# Altium PCB PCB_CSN_V3_1.PcbDoc
Units mil, origin at the board's own origin, x right, y up, seen from the top; angles counter-clockwise.
Board outline 3040 x 2075 mil, 2 copper layers (Top Layer, Bottom Layer); 83 components, 64 nets, 348 pads, 55 vias.
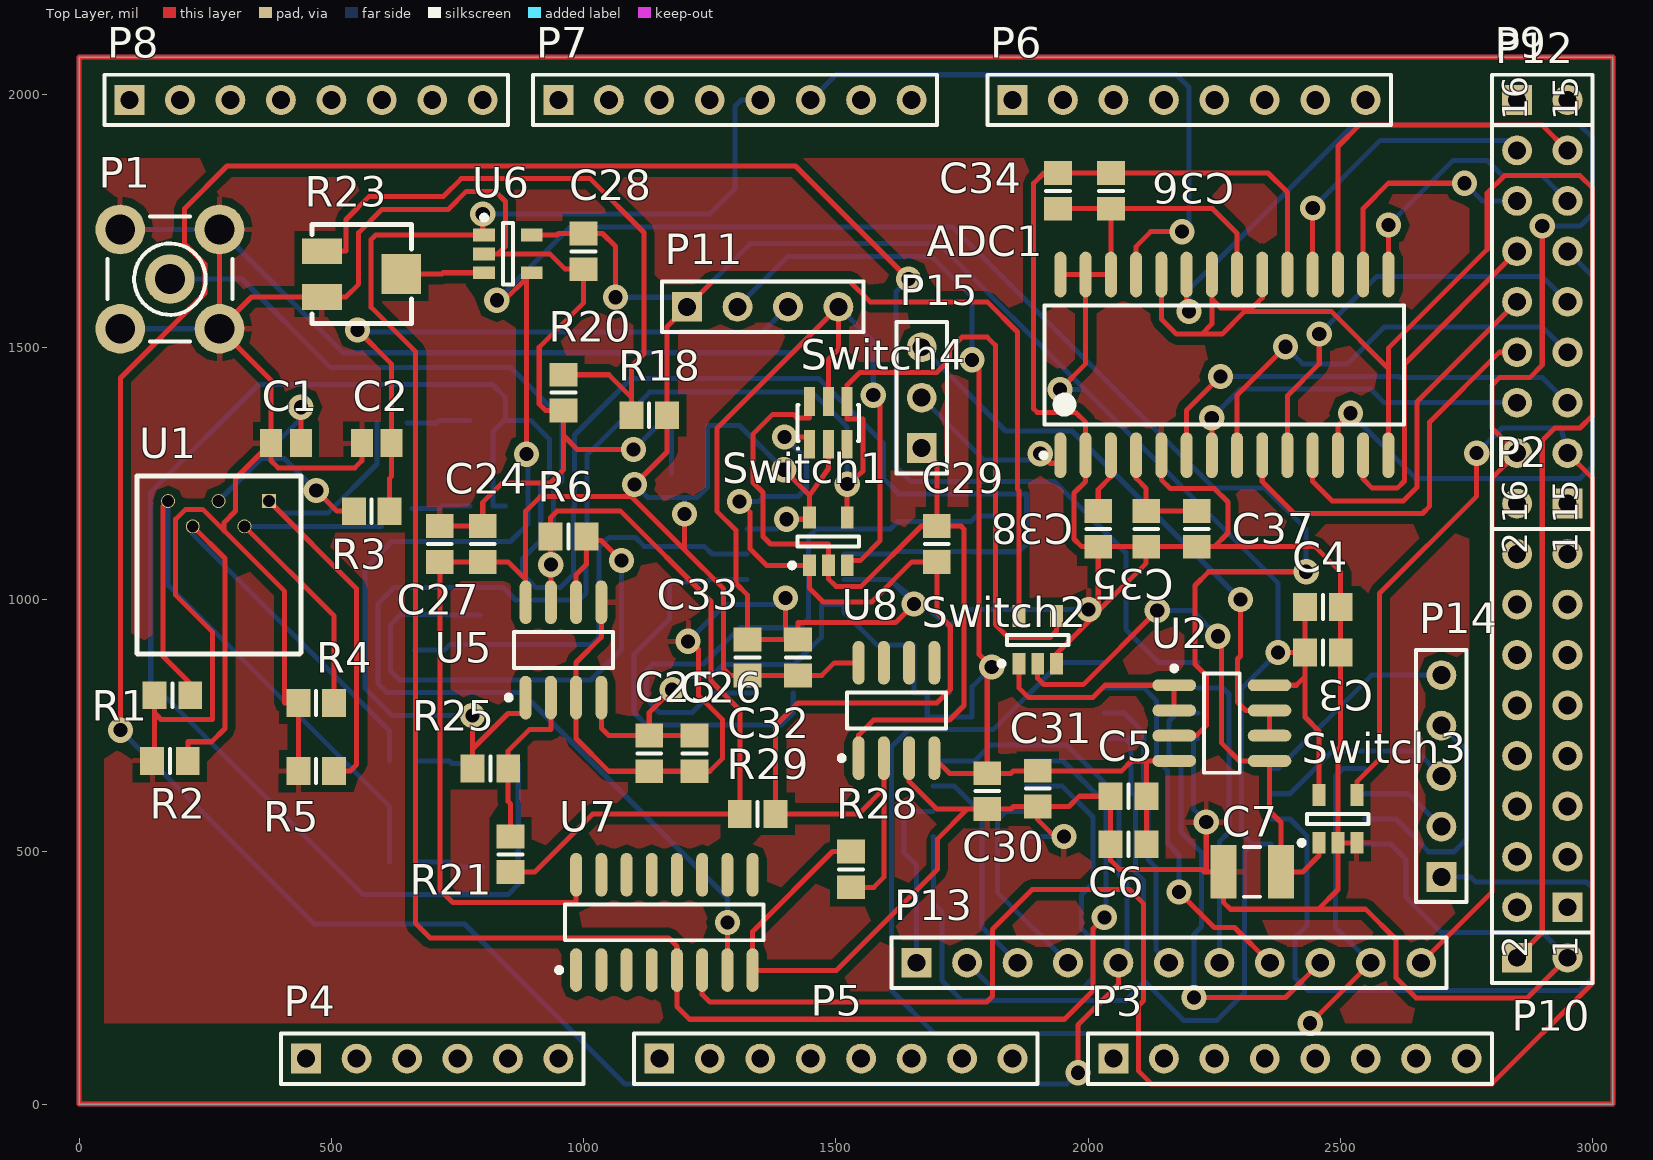
[diagram p0: Top Layer view]
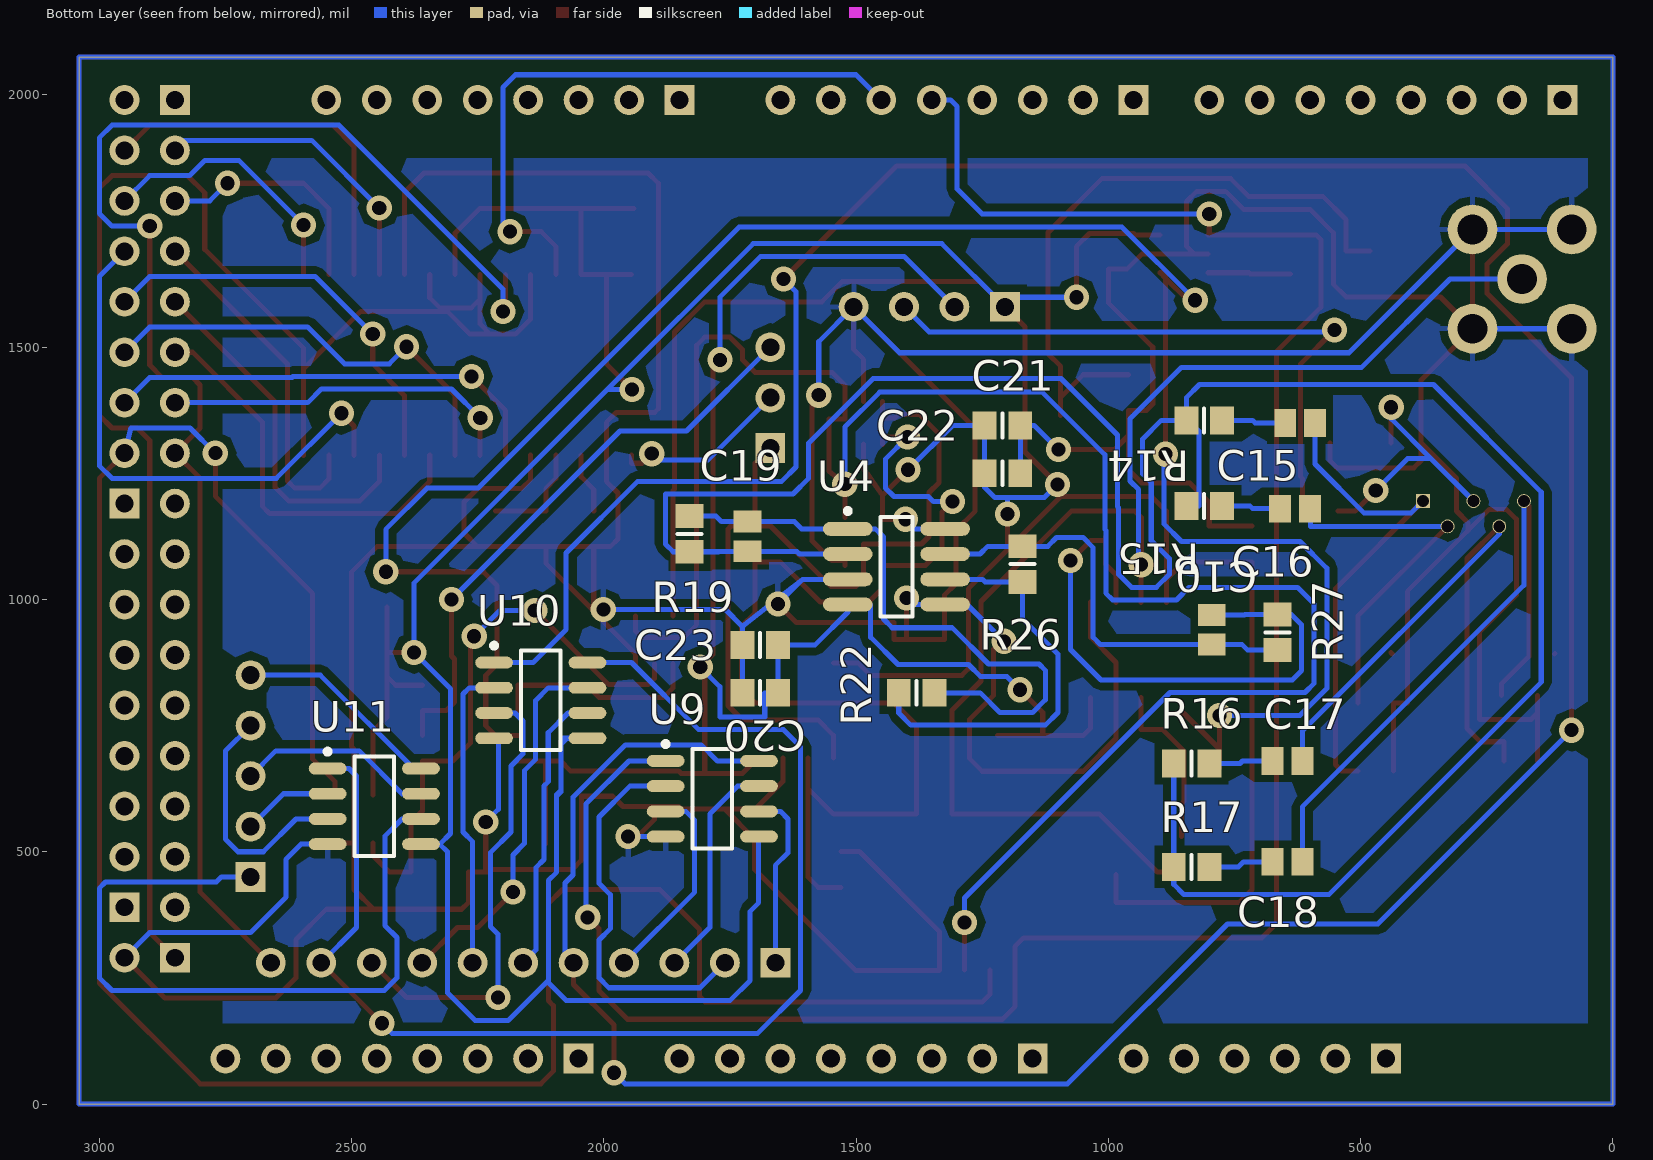
[diagram p1: Bottom Layer view, seen from below]

## Layer stack, top to bottom
Top Layer: signal copper 1.4
Dielectric: dielectric 12.6, FR-4, Dk 4.8
Bottom Layer: signal copper 1.4

## Board outline
0,0 0,2075 3040,2075 3040,0 0,0

## Design rules (kind name [scope] priority, off if disabled: settings)
Clearance [All] p1: gap=15
PolygonConnect [All] p1: connectstyle=Relief reliefconductorwidth=10 reliefentries=4 polygonreliefangle="90 Angle"
RoutingVias [All] p1: holewidth=28 width=50 viastyle="Through Hole" minholewidth=28 minwidth=50 maxholewidth=28 maxwidth=50
SilkscreenOverComponentPads [All] p1: minsilkscreentomaskgap=10
SolderMaskExpansion [All] p1: expansion=4
Width [All] p1: maxlimit=10 minlimit=10 preferedwidth=10
27 further rules are at their usual default settings.

## Classes and differential pairs
net class potencia: +5 +70V -5 GND
component class Logica_ADC: ADC1 C3 C4 C5 C6 C7 C29 C30 C31 C32 C33 C34 C35 C36 C37 C38 P2 P3 P4 P5 P6 P7 P8 P9 P10 P11 P12 P13 P14 P15 R28 Switch1 Switch2 Switch3 Switch4 U2 U7 U8 U9 U10 U11
component class Hamamatsu_acond_2: C1 C2 C10 C15 C16 C17 C18 C19 C20 C21 C22 C23 C24 C25 C26 C27 C28 P1 R1 R2 R3 R4 R5 R6 R14 R15 R16 R17 R18 R19 R20 R21 R22 R23 R25 R26 R27 R29 U1 U4 U5 U6
net class analog: NetADC1_4 NetC29_1 NetC29_2 NetR18_2 NetR23_W NetR25_2
net class digital: DGND NetADC1_18 NetADC1_23 NetADC1_25

## Components (designator, comment, footprint, x,y, rotation, side; value= is the part's Value field where it differs from the comment)
ADC1 "LTC1415" SO28_N 2270,1465 r90 top
C1 "Cap" C0805 410,1310 r0 top
C2 "Cap" C0805 590,1310 r0 top
C3 "Cap" 6-0805_N 2465,895 r180 top
C4 "Cap Pol3" 6-0805_N 2465,985 r0 top
C5 "Cap" 6-0805_N 2080,610 r180 top
C6 "Cap Pol3" 6-0805_N 2080,515 r0 top
C7 "Cap" C1210_N 2325,460 r0 top
C10 "Cap" C0805 795,940 r90 bottom
C15 "Cap" C0805 620,1350 r0 bottom
C16 "Cap" C0805 630,1180 r0 bottom
C17 "Cap" C0805 645,680 r0 bottom
C18 "Cap" C0805 645,480 r0 bottom
C19 "Cap" C0805 1715,1125 r90 bottom
C20 "Cap Pol3" 6-0805_N 1690,815 r180 bottom
C21 "Cap Pol3" 6-0805_N 1210,1345 r180 bottom
C22 "Cap" 6-0805_N 1210,1250 r0 bottom
C23 "Cap" 6-0805_N 1690,910 r180 bottom
C24 "Cap" 6-0805_N 800,1110 r270 top
C25 "Cap" 6-0805_N 1130,695 r270 top
C26 "Cap Pol3" 6-0805_N 1220,695 r90 top
C27 "Cap Pol3" 6-0805_N 715,1110 r90 top
C28 "Cap" 6-0805_N 1000,1690 r270 top
C29 "Cap" 6-0805_N 1700,1110 r90 top
C30 "Cap" 6-0805_N 1800,620 r270 top
C31 "Cap Pol3" 6-0805_N 1900,625 r90 top
C32 "Cap" 6-0805_N 1425,885 r270 top
C33 "Cap Pol3" 6-0805_N 1325,885 r90 top
C34 "Cap Pol3" 6-0805_N 1940,1810 r90 top
C35 "Cap Pol3" 6-0805_N 2115,1140 r270 top
C36 "Cap" 6-0805_N 2045,1810 r270 top
C37 "Cap" 6-0805_N 2215,1140 r90 top
C38 "Cap" 6-0805_N 2020,1140 r270 top
P1 "SMB" SMB_V-RJ45 180,1635 r0 top
P2 "Header 8X2" HDR2X8 2950,390 r90 top
P3 "Header 8" HDR1X8 2050,90 r0 top
P4 "Header 6" HDR1X6 450,90 r0 top
P5 "Header 8" HDR1X8 1150,90 r0 top
P6 "Header 8" HDR1X8 1850,1990 r0 top
P7 "Header 8" HDR1X8 950,1990 r0 top
P8 "Header 8" HDR1X8 100,1990 r0 top
P9 "Header 2" HDR1X2 2850,1990 r0 top
P10 "Header 2" HDR1X2 2850,290 r0 top
P11 "Header 4" HDR1X4 1205,1580 r0 top
P12 "Header 8X2" HDR2X8 2950,1190 r90 top
P13 "Header 11" HDR1X11 1660,280 r0 top
P14 "Header 5" HDR1X5 2700,450 r90 top
P15 "Header 3" HDR1X3 1670,1300 r90 top
R1 "Res3" 6-0805_N 185,810 r0 top
R2 "Res3" 6-0805_N 180,680 r0 top
R3 "Res3" 6-0805_N 580,1175 r0 top
R4 "Res3" 6-0805_N 470,795 r0 top
R5 "Res3" 6-0805_N 470,660 r0 top
R6 "Res3" 6-0805_N 970,1125 r180 top
R14 "Res3" 6-0805_N 810,1355 r0 bottom
R15 "Res3" 6-0805_N 810,1185 r0 bottom
R16 "Res3" 6-0805_N 835,675 r0 bottom
R17 "Res3" 6-0805_N 835,470 r0 bottom
R18 "Res3" 6-0805_N 1130,1365 r180 top
R19 "Res3" 6-0805_N 1830,1130 r90 bottom
R20 "Res3" 6-0805_N 960,1410 r90 top
R21 "Res3" 6-0805_N 855,495 r90 top
R22 "Res3" 6-0805_N 1380,815 r180 bottom
R23 "RPot SM" POT4MM-2 560,1645 r0 top
R25 "Res3" 6-0805_N 815,665 r180 top
R26 "Res3" 6-0805_N 1170,1070 r90 bottom
R27 "Res3" 6-0805_N 665,935 r90 bottom
R28 "Res3" 6-0805_N 1530,465 r90 top
R29 "Res3" 6-0805_N 1345,575 r0 top
Switch1 "SN74LVC1G66DBVR" SOT23-5_N 1485,1115 r90 top
Switch2 "SN74LVC1G66DBVR" SOT23-5_N 1900,920 r90 top
Switch3 "SN74LVC1G66DBVR" SOT23-5_N 2495,565 r90 top
Switch4 "ADG751" SOT-23_A 1485,1350 r0 top
U1 "MPPC_S10985" S10985_HAM 115,1245 r0 top
U2 "AD8066" S8_N 2265,755 r0 top
U4 "AD8056" SO-8_M 1420,1065 r180 bottom
U5 "AD8056" S8_N 960,900 r90 top
U6 "ADCMP600" SOT23-5_N 850,1685 r0 top
U7 "SN74LS279AD" D016_N 1160,360 r90 top
U8 "AD8066" S8_N 1620,780 r90 top
U9 "DS1100-500" SO-8_L 1785,605 r180 bottom
U10 "DS1100-500" SO-8_L 2125,800 r180 bottom
U11 "DS1100-500" SO-8_L 2455,590 r180 bottom

## Footprints (in the part's own frame and the unit in brackets; to place one, negate y for a bottom-side part, rotate by r counter-clockwise, add the part's x,y. Pads: shape width x height; smd on the part's side, far side on the other; paste and mask are expansions set on the pad)
6-0805_N [mm] "Chip Resistor, Body 2.0x1.2mm, IPC Medium Density"
  rect 1.2x1.4 smd: 1(-0.9,0) 2(0.9,0)
  silkscreen extent 0,-0.6 0,0.6, body extent -1.07,-0.7 1.07,0.7, height 0.7
C0805 [mm] "Chip Capacitor, Body 2.0x1.3mm, IPC High Density"
  rect 1.1x1.4 smd: 1(-0.75,0) 2(0.75,0)
  body extent -1.1,-0.72 1.1,0.72, height 1.4
C1210_N [mm] "Chip Capacitor, Body 3.2x2.5mm, IPC Medium Density"
  rect 1.3x2.7 smd: 1(-1.45,0) 2(1.45,0)
  silkscreen extent -0.4,-1.25 0.4,1.25, body extent -1.7,-1.35 1.7,1.35, height 1.5
D016_N [mm] "SOIC, 16-Leads, Body 9.9x3.9mm, Pitch 1.27mm, IPC Medium Density"
  oval 2.2x0.6 smd: 1(-2.4,4.445) 2(-2.4,3.175) 3(-2.4,1.905) 4(-2.4,0.635) 5(-2.4,-0.635) 6(-2.4,-1.905) 7(-2.4,-3.175) 8(-2.4,-4.445) 9(2.4,-4.445) 10(2.4,-3.175) 11(2.4,-1.905) 12(2.4,-0.635) 13(2.4,0.635) 14(2.4,1.905) 15(2.4,3.175) 16(2.4,4.445)
  silkscreen extent -2.52,-5 0.9,5.42, body extent -1.95,-4.95 1.95,4.95, height 1.75
HDR1X2 [mm] "Connector; Header; 2 Position"
  rect 1.5x1.5 hole 0.9: 1(0,0)
  round 1.5 hole 0.9: 2(2.54,0)
  silkscreen extent -1.27,-1.27 3.81,1.27
HDR1X3 [mm] "Connector; Header; 3 Position"
  rect 1.5x1.5 hole 0.9: 1(0,0)
  round 1.5 hole 0.9: 2(2.54,0) 3(5.08,0)
  silkscreen extent -1.27,-1.27 6.35,1.27
HDR1X4 [mm] "Connector; Header; 4 Position"
  rect 1.5x1.5 hole 0.9: 1(0,0)
  round 1.5 hole 0.9: 2(2.54,0) 3(5.08,0) 4(7.62,0)
  silkscreen extent -1.27,-1.27 8.89,1.27
HDR1X5 [mm] "Connector; Header; 5 Position"
  rect 1.5x1.5 hole 0.9: 1(0,0)
  round 1.5 hole 0.9: 2(2.54,0) 3(5.08,0) 4(7.62,0) 5(10.16,0)
  silkscreen extent -1.27,-1.27 11.43,1.27
HDR1X6 [mm] "Connector; Header; 6 Position"
  rect 1.5x1.5 hole 0.9: 1(0,0)
  round 1.5 hole 0.9: 2(2.54,0) 3(5.08,0) 4(7.62,0) 5(10.16,0) 6(12.7,0)
  silkscreen extent -1.27,-1.27 13.97,1.27
HDR1X8 [mm] "Connector; Header; 8 Position"
  rect 1.5x1.5 hole 0.9: 1(0,0)
  round 1.5 hole 0.9: 2(2.54,0) 3(5.08,0) 4(7.62,0) 5(10.16,0) 6(12.7,0) 7(15.24,0) 8(17.78,0)
  silkscreen extent -1.27,-1.27 19.05,1.27
HDR1X11 [mm] "Connector; Header; 11 Position"
  rect 1.5x1.5 hole 0.9: 1(0,0)
  round 1.5 hole 0.9: 2(2.54,0) 3(5.08,0) 4(7.62,0) 5(10.16,0) 6(12.7,0) 7(15.24,0) 8(17.78,0) 9(20.32,0) 10(22.86,0) 11(25.4,0)
  silkscreen extent -1.27,-1.27 26.67,1.27
HDR2X8 [mm] "Connector; Header; 8x2 Position"
  rect 1.5x1.5 hole 0.9: 1(0,0)
  round 1.5 hole 0.9: 2(0,2.54) 3(2.54,0) 4(2.54,2.54) 5(5.08,0) 6(5.08,2.54) 7(7.62,0) 8(7.62,2.54) 9(10.16,0) 10(10.16,2.54) 11(12.7,0) 12(12.7,2.54) 13(15.24,0) 14(15.24,2.54) 15(17.78,0) 16(17.78,2.54)
  silkscreen extent -1.27,-1.27 19.05,3.81
POT4MM-2 [mm] "Square Trimming Potentiometer"
  rect 2x1.3 smd: CCW(-2,-1.15) CW(-2,1.15)
  rect 2x2 smd: W(2,0)
  silkscreen extent -2.5,-2.5 2.5,2.5
S8_N [mm] "SOIC, 8-Leads, Body 4.9x3.9mm, Pitch 1.27mm, IPC Medium Density"
  oval 2.2x0.6 smd: 1(-2.4,1.905) 2(-2.4,0.635) 3(-2.4,-0.635) 4(-2.4,-1.905) 5(2.4,-1.905) 6(2.4,-0.635) 7(2.4,0.635) 8(2.4,1.905)
  silkscreen extent -2.52,-2.5 0.9,2.88, body extent -2,-2.5 2,2.5, height 1.76
S10985_HAM [mm]
  rect 0.7x0.7 hole 0.6: 1(6.64,-1.27)
  round 0.7 hole 0.6: 2(5.4,-2.54) 3(4.1,-1.27) 4(2.8,-2.54) 5(1.56,-1.27)
  Top Layer lines w0.254: 0,-8.95 0.025,-8.975 ; 8.175,-8.975 8.25,-8.9
  silkscreen extent 0,-8.97 8.25,0
SMB_V-RJ45 [mm] "Connector; SMB Straight"
  round 2.5 hole 1.5: 1(0,0) 2(-2.5,-2.5) 2(-2.5,2.5) 2(2.5,-2.5) 2(2.5,2.5)
  silkscreen extent -3.15,-3.15 3.15,3.15
SO28_N [mm] "28-Pin Plastic Small Outline Integrated Circuit 1.27 mm Pitch, IPC Medium Density"
  oval 2.3x0.6 smd: 1(-4.55,8.255) 2(-4.55,6.985) 3(-4.55,5.715) 4(-4.55,4.445) 5(-4.55,3.175) 6(-4.55,1.905) 7(-4.55,0.635) 8(-4.55,-0.635) 9(-4.55,-1.905) 10(-4.55,-3.175) 11(-4.55,-4.445) 12(-4.55,-5.715) 13(-4.55,-6.985) 14(-4.55,-8.255) 15(4.55,-8.255) 16(4.55,-6.985) 17(4.55,-5.715) 18(4.55,-4.445) 19(4.55,-3.175) 20(4.55,-1.905) 21(4.55,-0.635) 22(4.55,0.635) 23(4.55,1.905) 24(4.55,3.175) 25(4.55,4.445) 26(4.55,5.715) 27(4.55,6.985) 28(4.55,8.255)
  silkscreen extent -4.67,-9.05 3,9.23, body extent -3.8,-9.06 3.8,9.06, height 2.65
SO-8_L [mm] "SOIC, 8-Leads, Body 4.9x3.9mm, Pitch 1.27mm, IPC High Density"
  oval 1.9x0.6 smd: 1(-2.35,1.905) 2(-2.35,0.635) 3(-2.35,-0.635) 4(-2.35,-1.905) 5(2.35,-1.905) 6(2.35,-0.635) 7(2.35,0.635) 8(2.35,1.905)
  silkscreen extent -2.48,-2.5 1,2.88, body extent -1.95,-2.45 1.95,2.45, height 1.75
SO-8_M [mm] "SOIC, 8-Leads, Body 4.9x3.9mm, Pitch 1.27mm, IPC Low Density"
  oval 2.5x0.7 smd: 1(-2.45,1.905) 2(-2.45,0.635) 3(-2.45,-0.635) 4(-2.45,-1.905) 5(2.45,-1.905) 6(2.45,-0.635) 7(2.45,0.635) 8(2.45,1.905)
  silkscreen extent -2.58,-2.5 0.8,2.93, body extent -2,-2.5 2,2.5, height 1.75
SOT23-5_N [mm] "SOT23, 5-Leads, Body 2.9x1.6mm, Pitch 0.95mm, Lead Span 2.8mm, IPC Medium Density"
  rect 1.1x0.65 smd: 1(-1.2,0.95) 2(-1.2,0) 3(-1.2,-0.95) 4(1.2,-0.95) 5(1.2,0.95)
  silkscreen extent -1.32,-1.55 0.25,1.95, body extent -0.9,-1.55 0.9,1.55, height 1.45
SOT-23_A [mm] "SOT-457/SC-74; 6 Leads; Body 3.1 x 3 mm, inc. leads (LxW max)"
  rect 0.55x1.45 smd: 1(-0.95,-1.075) 2(0,-1.075) 3(0.95,-1.075) 4(0.95,1.075) 5(0,1.075) 6(-0.95,1.075)
  silkscreen extent -1.57,-1.35 1.55,0.9

## Part data
C1 C2 C3 C5 C7 C10 C15 C16 C17 C18 C19 C22 C23 C24 C25 C28 C29 C30 C32 C36 C37 C38: "Capacitor"
C4 C6 C20 C21 C26 C27 C31 C33 C34 C35: "Polarized Capacitor (Surface Mount)"
P1: "SMB Straight Connector"
P2 P12: "Header, 8-Pin, Dual row"
P3 P5 P6 P7 P8: "Header, 8-Pin"
P4: "Header, 6-Pin"
P9 P10: "Header, 2-Pin"
P11: "Header, 4-Pin"
P13: "Header, 11-Pin"
P14: "Header, 5-Pin"
P15: "Header, 3-Pin"
R1 R2 R3 R4 R5 R6 R14 R15 R16 R17 R18 R19 R20 R21 R22 R25 R26 R27 R28 R29: "Resistor"
R23: "Square Trimming Potentiometer"
U2 U5 U8: library part LT1253CS8, "Low Cost Dual Video Amplifier"
U4: library part AD8002AR, "Dual 600MHz, 50mW Current Feedback Amplifier"
U7: "Quadruple S-R Latches"

## Via types
v1: diameter 50, hole 28, Top Layer to Bottom Layer, 55 vias

## Nets (pads, with @x,y where several pads share a name; then routed paths per layer and width w, separated by ;. In a path a pad name is that pad's centre, name@x,y a point inside that pad or via, vN(x,y) a via of type N, cw(c..) or ccw(c..) an arc to the next point about the centre after c; other vN are vias at no path point)
+5: ADC1.21 ADC1.26 ADC1.27 ADC1.28 C3.2 C4.1 C21.1 C22.2 C24.2 C27.1 C28.1 C32.2 C33.1 C34.1 C36.2 P11.1 R18.1 Switch1.5 Switch2.5 Switch3.5 Switch4.2 U2.8 U4.8 U5.8 U6.5 U7.16 U8.8 U9.5 U10.5 U11.5 | length 10772.7
  Top Layer w10: U5.8 885,1039.57 ; U6.5 947,1722.4 950.03,1725.43 C28.1 1037.57,1725.43 1063,1700 v1(1063,1599) ; U7.16 985,399 741,399 715,425 C27.1 757,1074.57 C24.2 850,1074.57 885,1039.57 ; v1(1101,1228) 1165.43,1292.43 R18.1 1165.43,1540.43 P11.1 1255,1630 1528,1630 1568,1590 1800,1590 1860,1530 1860,1218.6 1862.6,1216 Switch2.5 ; v1(1200,1169.22) 1200,1098.44 ; v1(1397,1257) 1447.6,1206.4 ; v1(1402,1159) 1447.6,1159 Switch1.5 1447.6,1206.4 ; Switch4.2 1485,1259 1447.6,1206.4 ; U8.8 1496.92,874.49 1472,849.57 C32.2 1374,849.57 C33.1 1290.37,849.57 1277.44,862.5 1277.44,1021 1200,1098.44 ; C34.1 1992,1774.57 C36.2 ; v1(1944,1416) 1995,1467 ADC1.27 ; ADC1.28 ADC1.27 ; ADC1.21 2295,1726 2246.43,1774.57 C36.2 ; U2.8 2412.5,830 2429.57,847.07 ; v1(2376,895) C3.2 ; C4.1 2429.57,939 C3.2 ; Switch3.5 2457.6,739 2429.57,767.03 2429.57,847.07 ; 885,1039.57 885,1175 913.78,1203.78 1094.66,1203.78 1200,1098.44 ; ADC1.27 ADC1.26 C36.2 ; 2429.57,847.07 C3.2
  Bottom Layer w10: v1(1063,1599) 1186,1599 P11.1 1330.14,1705.14 1703.86,1705.14 1993,1416 ; v1(1101,1228) 1127,1202 1200,1202 ; v1(1200,1169.22) 1200,1202 ; U4.8 1383,1140 v1(1402,1159) ; v1(1397,1257) 1309,1345 C21.1 C22.2 1245.43,1222.43 1225,1202 1200,1202 ; U9.5 1693,530 1693,399 1710,382 1710,245 1749.53,205.47 2075,205.47 2109.73,240.2 2109.73,245.27 ; v1(1944,1416) 1993,1416 ; U10.5 2072.62,725 ; U11.5 2325,515 ; 1993,1416 2376,1033 v1(2376,895) 2304,823 2304,536 2325,515 ; 2072.62,725 2079.4,725 2085.12,719.28 2085.12,712.5 ; 2072.62,725 2085.12,712.5 ; 2085.12,622.07 2085.12,712.5 ; 2085.12,622.07 2085.12,618.19 2093.56,609.75 ; 2085.12,622.07 2093.56,613.63 2093.56,609.75 ; 2093.56,609.75 2093.56,459.44 2109.73,443.27 2109.73,245.27 ; 2109.73,245.27 2189.53,165.47 2255,165.47 2310,220.47 2310,500 2325,515
+70V: C2.2 P11.3 R3.2 | length 1263.6
  Top Layer w10: v1(552,1534) 619.53,1466.47 C2.2 619.53,1244.09 615.43,1240 R3.2
  Bottom Layer w10: v1(552,1534) 555.53,1530.47 1355.47,1530.47 P11.3
-5: C5.1 C6.2 C20.2 C23.2 C25.1 C26.2 C30.1 C31.2 P11.2 U2.4 U4.4 U5.4 U8.4 | length 3536.1
  Top Layer w10: U5.4 1035,745.43 1050,730.43 C25.1 ; v1(1175,821) 1130,776 C25.1 ; C26.2 C25.1 ; U8.4 1725.08,655.43 C30.1 ; v1(1770,1475) 1784,1461 1784,891 1800,875 v1@1800,857 ; v1(1809,866) v1@1800,857 ; C6.2 C5.1 2115.43,680 ; U2.4 2115.43,680 ; C30.1 v1@1800,857 ; C30.1 1847,655.43 1852,660.43 C31.2 2066.43,660.43 2086,680 2115.43,680
  Bottom Layer w10: v1(1175,821) 1201,847 1253,847 1277,871 1417,871 1471,925 1471,990 U4.4@1516,990 ; P11.2 1405.14,1680.14 1689,1680.14 1770,1599.14 v1(1770,1475) ; U4.4 U4.4@1516,990 ; v1(1809,866) 1770,827 1770,767 1681,767 1681,815 C20.2 C23.2 1581,910 1516,975 U4.4@1516,990
DGND: ADC1.14 ADC1.20 ADC1.22 ADC1.24 P10.1 | length 3355.8
  Top Layer w10: ADC1.24 2145,1555.86 2175,1525.86 2225,1525.86 ; ADC1.22 2245,1595.5 ; ADC1.20 2345,1598 2325,1578 2262.5,1578 2245,1595.5 ; ADC1.14 2595,1457.63 ; P10.1 2900,340 2900,1315 2925,1340 2975,1340 3000,1365 3000,1815 2975,1840 2825,1840 2791,1806 2791,1694 2595,1498 2595,1457.63 ; 2225,1525.86 2245,1545.86 2245,1595.5 ; 2225,1525.86 2265.33,1525.86 2310.48,1571 2481.63,1571 2595,1457.63
GND: ADC1.2 ADC1.5 ADC1.19 C1.1 C2.1 C3.1 C4.2 C5.2 C6.1 C7.1 C20.1 C21.2 C22.1 C23.1 C24.1 C25.2 C26.1 C27.2 C28.2 C30.2 C31.1 C32.1 C33.2 C34.2 C35.2 C36.1 C37.1 C38.2 P1.2 P10.2 P11.4 R1.1 R2.1 R4.1 R5.1 R20.1 R23.CCW R28.2 Switch1.3 Switch2.3 Switch3.2 Switch3.3 Switch4.5 U4.3 U4.5 U5.3 U5.5 U6.2 U7.8 U8.3 U9.4 U10.4 U11.4 | length 17307.8
  Top Layer w10: R2.1 149.57,680 149.57,774.93 ; R1.1 149.57,774.93 ; P1.2@278.43,1733.43 P1.2@278.43,1536.57 ; R5.1 R4.1 407.5,795 407.5,1016.15 287.5,1136.15 ; C2.1 560.47,1275 546.48,1261.01 394.47,1261.01 380.47,1275 C1.1 ; C27.2 757,1145.43 C24.1 800,1192.53 838.47,1231 934,1231 960,1257 960,1325 ; U6.2 830,1685 ; U5.5 1035,925 985,875 U5.3 985,724.57 1050,659.57 C25.2 1174,659.57 C26.1 1250,659.57 1275,684.57 1275,762.5 1227.44,810.06 1227.44,902.06 1212.5,917 v1(1207,917) ; v1(1099,1297) 988,1297 960,1325 ; v1(1400,1003) C32.1@1400,920.43 ; Switch4.5 1485,1476 1505,1496 P11.4 1264,1339 1264,1175 1301.77,1137.23 1301.77,1031.8 1325,1008.57 C33.2 1375,920.43 C32.1@1400,920.43 ; Switch1.3 1522.4,1077 1548,1077 1587,1116 1587,1392 v1(1574,1405) ; R28.2 1493.43,500.43 1335,342 U7.8 1335,265 1501,265 1701,465 1701,525 1760.57,584.57 ; U8.3 1645,639.57 1700,584.57 1760.57,584.57 ; v1(1655,991) 1618,954 1425,954 C32.1 C32.1@1400,920.43 ; Switch2.3 1937.4,892.4 2020,975 v1@2020,980 ; v1(1952,530) 1933.5,530 1900,563.5 C31.1 ; v1(2001,980) v1@2020,980 ; ADC1.5 2145,1237.5 2162.5,1220 2250,1220 2277,1193 2277,1131.57 2250,1104.57 ; v1(2234,559) 2234,460 ; ADC1.19 2395,1807 2356.57,1845.43 C36.1 C34.2 1912.43,1845.43 1892,1825 1892,1378 1899,1371 1975,1371 1995,1351 ADC1.2 1995,1234 1972,1211 1972,1120.07 1987.5,1104.57 C38.2 ; Switch3.3 Switch3.2 ; P10.2 2870,210 2650,210 2610,250 2610,326 2550,386 2456,386 ; 149.57,774.93 162.5,762 264.06,762 264.06,935.94 191.46,1008.54 191.46,1158.99 211.24,1178.78 244.87,1178.78 287.5,1136.15 ; P1.2@278.43,1536.57 341.58,1599.72 R23.CCW 528.72,1599.72 554,1625 554,1727 600,1773 731.55,1773 767.55,1809 825,1809 845,1789 845,1700 830,1685 ; P1.2@278.43,1536.57 380.47,1434.53 C1.1 ; 287.5,1136.15 287.5,1152.67 310.2,1175.37 310.2,1239.73 C1.1 ; 830,1685 933,1685 963.43,1654.57 C28.2 1000,1588 912,1500 912,1387.5 924.93,1374.57 R20.1 960,1325 ; 1760.57,584.57 C30.2 1847,584.57 1852,589.57 C31.1 ; C31.1 1962,589.57 1982.43,610 C5.2 2044.57,562 C6.1 2044.57,482.93 2062.5,465 2225,465 2230,460 2234,460 ; v1@2020,980 2023.1,980 2115,1071.9 C35.2 ; v1@2020,980 C38.2 ; C38.2 C35.2 ; C35.2 2164,1104.57 C37.1 2250,1104.57 ; 2234,460 C7.1 2267.91,400 2281.91,386 2456,386 ; 2250,1104.57 2450,1104.57 2500.43,1054.13 C4.2 C3.1 2500.43,708.43 2495,703 Switch3.2 ; 2456,386 2495,425 Switch3.2
  Bottom Layer w10: P1.2@81.57,1536.57 P1.2@278.43,1536.57 ; P1.2@81.57,1733.43 278.43,1733.43 522.85,1489 1414,1489 P11.4 1574,1511 v1(1574,1405) ; v1(1099,1297) 1147,1345 C21.2 1174.57,1297 C22.1 ; v1(1207,917) 1280,990 U4.5 1387,990 v1(1400,1003) ; U4.3 1606,1040 ; v1(1655,991) 1606,1040 ; C20.1 C23.1 1725.43,946.48 ; U9.4 v1(1952,530) ; v1(2001,980) 1758.95,980 1725.43,946.48 ; U10.4 2209,725 2209,584 v1(2234,559) ; U11.4 2600,515 2630,485 2630,410 2700,340 2900,340 P10.2 ; 1606,1040 1660.16,997.59 1725.43,946.48
NetADC1_1: ADC1.1 P15.2 | length 363.1
  Top Layer w10: v1(1905,1289) 1924,1270 1945,1270 ADC1.1
  Bottom Layer w10: P15.2 1794,1276 1905,1276 v1(1905,1289)
NetADC1_3: ADC1.3 C38.1 | length 120.8
  Top Layer w10: C38.1 2020,1218 2045,1243 ADC1.3
NetADC1_4: ADC1.4 C35.1 C37.2 | length 218.7
  Top Layer w10: ADC1.4 2095,1240 2115,1220 C35.1 2164,1175.43 C37.2
NetADC1_6: ADC1.6 P12.5 | length 893.4
  Top Layer w10: ADC1.6 2195,1375 v1(2262,1442)
  Bottom Layer w10: v1(2262,1442) 2615.95,1442 2617.95,1440 2900,1440 P12.5
NetADC1_7: ADC1.7 P12.6 | length 713.9
  Top Layer w10: ADC1.7 v1(2245,1360)
  Bottom Layer w10: v1(2245,1360) 2302,1417 2560,1417 2587,1390 P12.6
NetADC1_8: ADC1.8 P12.7 | length 878.9
  Top Layer w10: ADC1.8 2295,1405 v1(2391,1501)
  Bottom Layer w10: v1(2391,1501) 2425,1467 2514,1467 2587,1540 2900,1540 P12.7
NetADC1_9: ADC1.9 P12.8 | length 813.2
  Top Layer w10: ADC1.9 2345,1234 2408.41,1170.59 2662.5,1170.59 2676.81,1184.9 2676.81,1351.8 2815.01,1490 P12.8
NetADC1_10: ADC1.10 P12.9 | length 826.2
  Top Layer w10: ADC1.10 2395,1404 2458,1467 v1(2458,1526)
  Bottom Layer w10: v1(2458,1526) 2572,1640 2900,1640 P12.9
NetADC1_11: ADC1.11 P12.10 | length 735.4
  Top Layer w10: ADC1.11 2445,1234 2483.41,1195.59 2625,1195.59 2651.81,1222.4 2651.81,1391.81 P12.10
NetADC1_12: ADC1.12 P12.11 | length 1083
  Top Layer w10: ADC1.12 2495,1344 v1(2520,1369)
  Bottom Layer w10: v1(2520,1369) 2649,1240 2975,1240 3000,1265 3000,1640 P12.11
NetADC1_13: ADC1.13 P12.12 | length 690
  Top Layer w10: ADC1.13 2545,1238.59 2563,1220.59 2612.5,1220.59 2626.81,1234.9 2626.81,1466.81 P12.12
NetADC1_15: ADC1.15 P12.13 | length 539.4
  Top Layer w10: ADC1.15 v1(2595,1742)
  Bottom Layer w10: v1(2595,1742) 2723.5,1870.5 2790.63,1870.5 2821.13,1840 2900,1840 P12.13
NetADC1_16: ADC1.16 P12.14 | length 471.1
  Top Layer w10: ADC1.16 2545,1775 2595,1825 v1(2746,1825)
  Bottom Layer w10: v1(2746,1825) 2781,1790 P12.14
NetADC1_17: ADC1.17 P12.15 | length 747
  Top Layer w10: ADC1.17 2495,1898 2537,1940 2900,1940 P12.15
NetADC1_18: ADC1.18 P12.16 | length 612.4
  Top Layer w10: ADC1.18 v1(2445,1776)
  Bottom Layer w10: v1(2445,1776) 2579,1910 2850,1910 P12.16
NetADC1_23: ADC1.23 P12.4 P13.11 | length 2960.1
  Top Layer w10: ADC1.23 2195,1576 v1(2200,1571) ; P13.11 2800,420 2800,1240 P12.4 2800.47,1339.53 2800.47,1425 2815,1439.53 2875,1439.53 2900,1464.53 v1(2900,1740)
  Bottom Layer w10: v1(2200,1571) 2200,1615 2525,1940 2975,1940 3000,1915 3000,1765 2975,1740 v1(2900,1740)
NetADC1_25: ADC1.25 P7.6 | length 1231.7
  Top Layer w10: ADC1.25 2095,1700 2124,1729 v1(2186,1729)
  Bottom Layer w10: P7.6 1500,2040 2175,2040 2200,2015 2200,1743 v1(2186,1729)
NetC1_2: C1.2 R3.1 U1.3 | length 551.8
  Top Layer w10: C1.2 v1(439.53,1381) ; v1(470,1216) 511,1175 R3.1
  Bottom Layer w10: U1.3 360.42,1279 ; v1(439.53,1381) 439.53,1358.11 360.42,1279 ; v1(470,1216) 407,1279 360.42,1279
NetC7_2: C7.2 Switch2.2 Switch3.1 U2.5 | length 1141.1
  Top Layer w10: Switch2.2 1900,843.6 1912.5,831.1 1990.1,831.1 v1(2137,978) ; v1(2257,927) 2264,920 2264,716 2300,680 U2.5 2359.49,580.6 2382.09,558 C7.2 2425,460 2457.6,492.6 Switch3.1
  Bottom Layer w10: v1(2137,978) 2206,978 v1(2257,927)
NetC10_1: C10.1 R26.2 R27.1 U4.7 | length 868.7
  Bottom Layer w10: R27.1 724,899.57 734.9,910.47 C10.1 1015.47,910.47 1030,925 1030,1102.8 1050,1122.8 1102.64,1122.8 1120,1105.43 R26.2 1239,1105.43 1254.43,1090 U4.7
NetC10_2: C10.2 R6.1 R27.2 U5.6 | length 1169.6
  Top Layer w10: U5.6 985,1049 1005.43,1069.43 R6.1@1005.43,1117 ; R6.1 R6.1@1005.43,1117 ; v1(1075,1077) 1035,1117 R6.1@1005.43,1117
  Bottom Layer w10: C10.2 729.91,969.53 729,970.43 R27.2 637.43,970.43 617,950 617,859 635.42,840.58 1014.58,840.58 1075,901 v1(1075,1077)
NetC15_1: C15.1 R5.2 U1.1 | length 990.1
  Top Layer w10: U1.1 550,1021.42 550,672.5 537.5,660 R5.2
  Bottom Layer w10: U1.1 400.42,1171 493.09,1171 590.47,1268.38 C15.1
NetC15_2: C15.2 R14.1 | length 127.1
  Bottom Layer w10: C15.2 709,1350 714,1355 R14.1
NetC16_1: C16.1 R4.2 U1.2 | length 730.6
  Top Layer w10: U1.2 505.43,967.16 R4.2
  Bottom Layer w10: U1.2 599.47,1145 C16.1
NetC16_2: C16.2 R15.1 | length 117.1
  Bottom Layer w10: C16.2 714,1180 719,1185 R15.1
NetC17_1: C17.1 R2.2 U1.4 | length 1176.3
  Top Layer w10: R2.2 215.43,718 262.76,718 289.06,744.3 289.06,1081.18 U1.4
  Bottom Layer w10: U1.4 225.24,1129.53 615.47,739.29 C17.1
NetC17_2: C17.2 R16.1 | length 127.1
  Bottom Layer w10: C17.2 734,680 739,675 R16.1
NetC18_1: C18.1 R1.2 U1.5 | length 1308.3
  Top Layer w10: U1.5 166.46,1185.04 166.46,887.4 220.43,833.43 R1.2
  Bottom Layer w10: U1.5 176.42,1028.05 615.47,589 C18.1
NetC18_2: C18.2 R17.1 | length 129.2
  Bottom Layer w10: C18.2 732,480 742,470 R17.1
NetC19_1: C19.1 R14.2 R15.2 R16.2 R17.2 R19.1 U4.2 | length 4920.9
  Bottom Layer w10: R15.2 820.75,1185 820.75,1333.75 842,1355 R14.2 ; R16.2 R17.2 870.43,435.43 850,415 563,415 142,836 142,1212.5 355.5,1426 819.43,1426 845.43,1400 R14.2 ; U4.2 1612,1090 1617.47,1095.47 C19.1 1772,1095.47 1772.9,1094.57 R19.1 1862.5,1094.57 1878,1110.07 1878,1209.06 1625,1209.06 1594,1240.06 1594,1310 1466,1438 1094,1438 982,1326 982,1184 980,1182 980,1050 954,1024 905,1024 879,1050 879,1081 915,1117 915,1232 932,1249 932,1318 895,1355 R14.2
NetC19_2: C19.2 R19.2 R22.2 U4.1 | length 1231.5
  Bottom Layer w10: R22.2 1254,815 1215,776 1150,776 1125,801 1125,859.5 1137.5,872 1237.5,872 1309.5,944 1428.45,944 1445.76,961.31 1445.76,1123.76 1462,1140 U4.1 1608,1140 1622.53,1154.53 C19.2 1767,1154.53 1777.91,1165.43 R19.2
NetC29_1: C29.1 R28.1 R29.2 Switch1.1 Switch4.1 U8.2 | length 2262.9
  Top Layer w10: v1(1309,1194) 1330,1173 1330,1100 1362.24,1067.76 Switch1.1 1447.6,1022.4 1475,995 1570.82,995 1650.39,1074.57 C29.1 1700,973.48 1727,946.48 1727,822 1700,795 1425,795 1380.43,750.43 R29.2 1545,575 1595,625 ; v1(1398,1322) 1447.6,1322 Switch4.1 ; R28.1 1575,429.57 1595,449.57 1595,625 ; U8.2 1595,625
  Bottom Layer w10: v1(1309,1194) 1347,1194 1357,1204 1425,1204 1442,1221 1442,1278 v1(1398,1322)
NetC29_2: C29.2 P15.1 Switch1.2 Switch4.6 U8.1 | length 1701.9
  Top Layer w10: Switch4.6 1447.6,1360 1422.68,1360 1415.68,1367 1375,1367 1335.37,1327.37 1335.37,1231.89 1355.37,1211.89 1355.37,1125 1370.37,1110 1485,1110 Switch1.2 1485,1041 1500,1026 1550,1026 1669.43,1145.43 C29.2 ; U8.1 1545,731 1575,761 1725,761 1754,790 1754,1139.43 1748,1145.43 C29.2 ; P15.1 1700,1270 C29.2
NetP1_1: P1.1 R6.2 R21.1 R29.1 U5.7 | length 2702.3
  Top Layer w10: R21.1 902.57,459.57 1018,575 R29.1 1309.57,781.15 1252.44,838.28 1252.44,996 1073.44,1175 947.07,1175 934.57,1162.5 R6.2 934.57,1069.43 v1(935,1069) U5.7
  Bottom Layer w10: P1.1 323,1635 498,1460 855,1460 957,1358 957,1235 940,1218 940,1074 v1(935,1069)
NetP7_5: P7.5 U6.1 U7.5 U9.1 | length 4488.8
  Top Layer w10: v1(800,1764) U6.1@800,1722.4 ; U6.1 U6.1@800,1722.4 ; v1(2032,370) 2010,348 2010,225 1953,168 1210,168 1185,193 U7.5 1185,312.5 1168.5,329 696,329 667,358 667,1491 579,1579 579,1713.4 588,1722.4 U6.1@800,1722.4
  Bottom Layer w10: v1(800,1764) 1250,1764 1300,1814 1300,1977.5 1312.5,1990 P7.5 ; U9.1 1950.08,680 2035.12,594.96 2035.12,373.12 v1(2032,370)
NetP12_3: P12.3 Switch3.4 U7.6 | length 4527.6
  Top Layer w10: U7.6 1235,217 1250,202 1799,202 1810,213 1810,346 1889,425 2082,425 2110,397 2110,205 2100,195 2100,65 2125,40 2800,40 3000,240 3000,1240 P12.3 ; Switch3.4 2532.4,639 2577,683.6 2577,1011.85 2770,1204.85 v1(2770,1290)
  Bottom Layer w10: v1(2770,1290) 2820,1340 2937.5,1340 P12.3
NetP13_1: P13.1 U9.6 | length 359
  Bottom Layer w10: P13.1 1660,473 1635,498 1635,565 1650,580 U9.6
NetP13_2: P13.2 U9.2 | length 773.1
  Bottom Layer w10: P13.2 1809.53,230.47 1990,230.47 2009.53,250 2009.53,325 1987,347.53 1987,415 2009.53,437.53 2009.53,569.03 1948.56,630 U9.2
NetP13_3: P13.3 U9.7 | length 444.3
  Bottom Layer w10: U9.7 1735,630 1790,575 1790,350 P13.3
NetP13_4: P13.4 U9.3 | length 405.3
  Bottom Layer w10: U9.3 1837.5,580 1820,562.5 1820,420 P13.4
NetP13_5: P13.5 U9.8 U10.1 | length 7128.2
  Top Layer w10: v1(82,741) 82,1439.12 249.21,1606.33 249.21,1664.75 209.21,1704.76 209.21,1775 293.21,1859 1420,1859 v1(1644,1635) ; v1(1980,62) 1980,157 2060,237 P13.5
  Bottom Layer w10: v1(82,741) 466,357 764,357 1081,40 1958,40 v1(1980,62) ; v1(1644,1635) 1619,1610 1619,1262.5 1647.44,1234.06 1932.94,1234.06 2074.77,1092.23 2074.77,940.25 2140.01,875 U10.1 ; U9.8 1775,680 1807,712 1957,712 2061,608 2061,454 2077,438 2077,297 P13.5
NetP13_6: P13.6 U10.6 | length 570.4
  Bottom Layer w10: U10.6 2071,775 2110.12,735.88 2110.12,639 2118.56,630.56 2118.56,484.44 2134.73,468.27 2134.73,305.27 P13.6
NetP13_7: P13.7 U10.2 | length 607
  Bottom Layer w10: U10.2 2266.5,825 2279,812.5 2279,539 2260,520 P13.7
NetP13_8: P13.8 U10.7 | length 749.5
  Top Layer w10: v1(2180,420) 2250,350 2290,350 P13.8
  Bottom Layer w10: U10.7 2110,825 2135.12,799.88 2135.12,683.07 2157.51,660.67 2157.51,516.21 2180,493.73 v1(2180,420)
NetP13_9: P13.9 U10.3 | length 923.8
  Top Layer w10: v1(2210,211) 2391,211 P13.9
  Bottom Layer w10: v1(2210,211) 2210,337 2225,352 2225,498 2184,539 2184,670.12 2160.12,694 2160.12,759.12 2176,775 U10.3
NetP13_10: P13.10 U10.8 U11.1 | length 2480.6
  Top Layer w10: v1(2440,160) P13.10
  Bottom Layer w10: U10.8 1945,875 1812,742 1644,742 1610,708 1610,225 1695,140 2420,140 v1(2440,160) ; U11.1 2505,665 2490,650 2490,350 P13.10
NetP14_1: P14.1 U11.6 | length 1474.1
  Bottom Layer w10: U11.6 2400,565 2434,531 2434,354 2410,330 2410,250 2435,225 2975,225 3000,250 3000,427.5 2987.5,440 2768,440 2758,450 P14.1
NetP14_2: P14.2 U11.2 | length 179.4
  Bottom Layer w10: U11.2 2635,615 P14.2
NetP14_3: P14.3 U11.7 | length 393.4
  Bottom Layer w10: U11.7 2400,615 2485,700 2650,700 P14.3
NetP14_4: P14.4 U11.3 | length 485.5
  Bottom Layer w10: U11.3 2610,565 2675,500 2725,500 2750,525 2750,700 P14.4
NetP14_5: P14.5 U11.8 | length 414.1
  Bottom Layer w10: U11.8 2377,665 2562,850 P14.5
NetP15_3: P15.3 U2.6 U2.7 | length 1165.4
  Top Layer w10: v1(2302,1000) 2302,888 2296,882 2296,796.5 2312.5,780 U2.7 U2.6
  Bottom Layer w10: P15.3 1836,1334 1968,1334 v1(2302,1000)
NetR18_2: R18.2 R20.2 R23.CW | length 1304.7
  Top Layer w10: R23.CW 529,1690.28 529,1753 575,1799 722.2,1799 757.2,1834 1013,1834 1119.78,1727.22 1119.78,1487.3 1094.57,1462.08 1094.57,1400.87 ; R20.2 1050,1445.43 1094.57,1400.87 ; R18.2 1094.57,1400.87
NetR21_2: R21.2 R25.1 U5.2 | length 336.9
  Top Layer w10: R21.2 855,595 850.43,599.57 R25.1 850.43,700 892.43,742 935,742 U5.2
NetR22_1: R22.1 R26.1 U4.6 | length 819.1
  Bottom Layer w10: U4.6 1249.43,1040 1244,1034.57 R26.1 1170,961.72 1100,891.72 1100,776 1125,751 1391.43,751 1415.43,775 R22.1
NetR23_W: R23.W U6.3 | length 165.1
  Top Layer w10: R23.W 719,1645 721.6,1647.6 U6.3
NetR25_2: R25.2 U2.3 U5.1 U6.4 | length 4291
  Top Layer w10: R25.2 779.57,703.57 ; v1(779.57,770) 779.57,703.57 ; v1(828,1593) 842.65,1593 U6.4@887,1637.35 ; U5.1 885,774 850,774 779.57,703.57 ; v1(887,1288) U6.4@887,1637.35 ; U2.3 2214,730 2234,750 2234,849.36 2211.9,871.46 2211.9,1027.9 2239,1055 v1(2432,1055) ; U6.4@887,1637.35 887,1647.6 U6.4 U6.4@887,1637.35
  Bottom Layer w10: v1(779.57,770) 620.64,770 567,823.64 567,1062 620,1115 855,1115 890,1150 890,1285 v1(887,1288) ; v1(828,1593) 973,1738 1732,1738 2249,1221 2350,1221 2432,1139 v1(2432,1055)
NetSwitch1_4: Switch1.4 Switch2.4 Switch4.4 U7.7 | length 3977.1
  Top Layer w10: U7.7 v1(1285,360) ; Switch1.4 v1(1522.4,1228.6) 1554,1254.6 1554,1358 1522.4,1358 Switch4.4 1522.4,1425 1547.4,1450 1700,1450 1725,1475 1725,1495 1750,1520 1800,1520 1816,1504 1816,950 1841,925 1924.9,925 1937.4,937.5 Switch2.4
  Bottom Layer w10: v1(1285,360) 1285,408.51 877.93,815.58 610.42,815.58 592,834 592,991 625,1024 840,1024 865,999 991.5,999 1005,1012.5 1005,1137 1007,1139 1007,1286.95 1131.05,1411 1453.29,1411 1522.4,1341.89 v1(1522.4,1228.6)
NetSwitch2_1: Switch2.1 U2.1 U2.2 | length 423.4
  Top Layer w10: Switch2.1 1862.6,825 1881.5,806.1 2009.55,806.1 2033.45,830 U2.1 U2.2
pads on no net: P2.1 P2.2 P2.3 P2.4 P2.5 P2.6 P2.7 P2.8 P2.9 P2.10 P2.11 P2.12 P2.13 P2.14 P2.15 P2.16 P3.1 P3.2 P3.3 P3.4 P3.5 P3.6 P3.7 P3.8 P4.1 P4.2 P4.3 P4.4 P4.5 P4.6 P5.1 P5.2 P5.3 P5.4 P5.5 P5.6 P5.7 P5.8 P6.1 P6.2 P6.3 P6.4 P6.5 P6.6 P6.7 P6.8 P7.1 P7.2 P7.3 P7.4 P7.7 P7.8 P8.1 P8.2 P8.3 P8.4 P8.5 P8.6 P8.7 P8.8 P9.1 P9.2 P12.1 P12.2 Switch4.3 U7.1 U7.2 U7.3 U7.4 U7.9 U7.10 U7.11 U7.12 U7.13 U7.14 U7.15 U8.5 U8.6 U8.7

## Polygon pours and split planes (outlines as drawn)
GND on Bottom Layer "Top Layer-No Net" (solid, pour order 6): 50,1885 50,160 2755,160 2755,1875 50,1875
GND on Top Layer "Top Layer-No Net" (solid, pour order 8): 50,1875 50,160 2755,160 2755,1875 50,1875

## Other copper
Multi-Layer:
  the board outline again, w10

## Text inside footprints (layer, text, board x,y; h text height)
P2: Top Overlay "2" at 2870,290 h50 r90; Top Overlay "1" at 2970,290 h50 r90; Top Overlay "15" at 2970,1150 h50 r90; Top Overlay "16" at 2870,1150 h50 r90
P12: Top Overlay "2" at 2870,1090 h50 r90; Top Overlay "1" at 2970,1090 h50 r90; Top Overlay "15" at 2970,1950 h50 r90; Top Overlay "16" at 2870,1950 h50 r90